# Altium PCB ENCODER_OD.PcbDoc
Units mil, origin at the board's own origin, x right, y up, seen from the top; angles counter-clockwise.
Board outline 6000 x 4000 mil, 2 copper layers (Top Layer, Bottom Layer); 4 components, 8 nets, 38 pads, 18 vias.
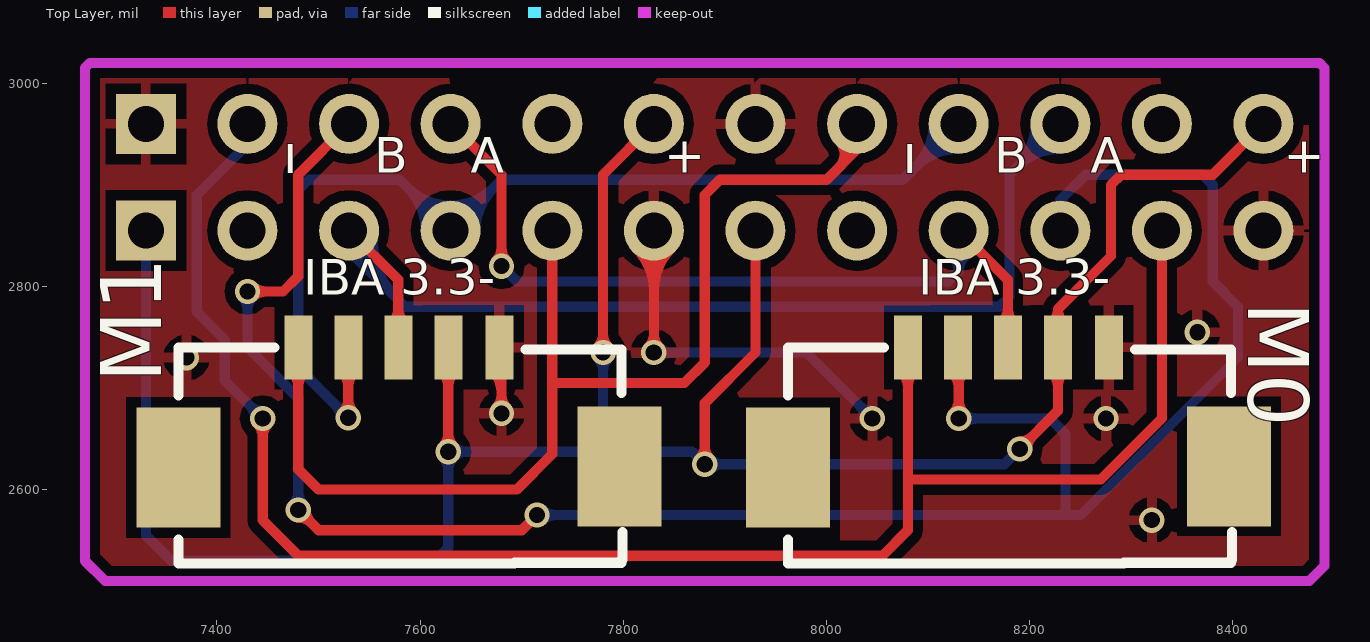
[diagram p0: Top Layer view]
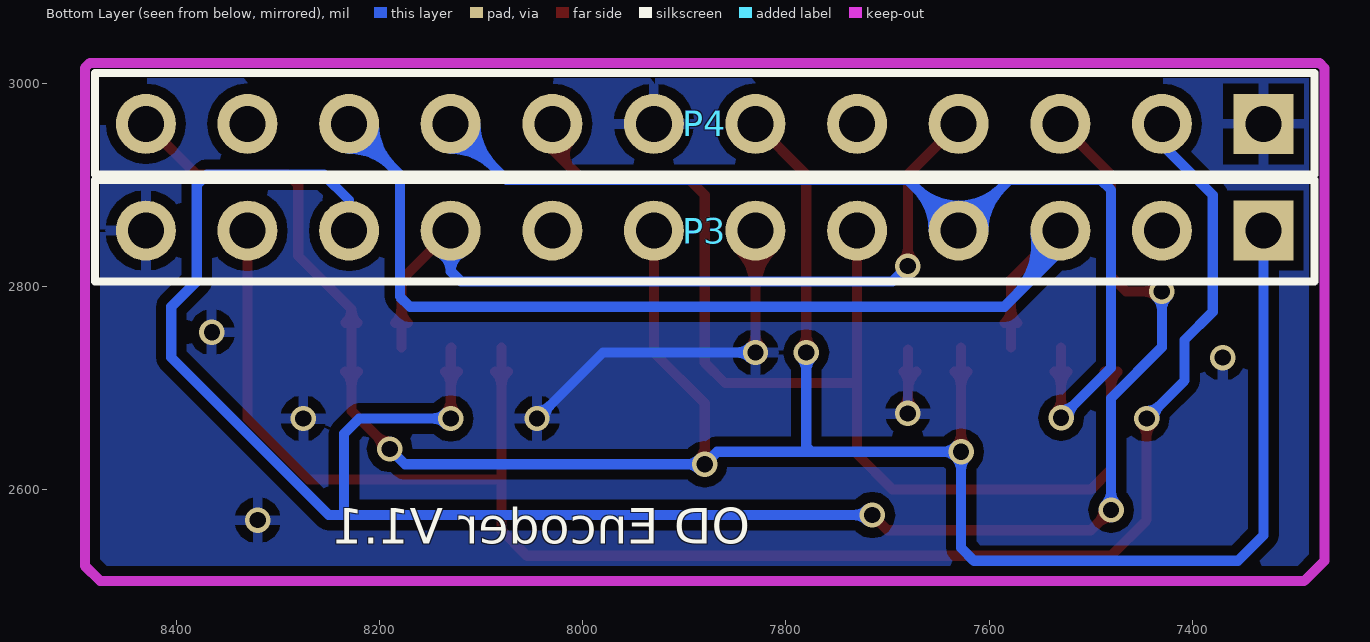
[diagram p1: Bottom Layer view, seen from below]

## Layer stack, top to bottom
Top Layer: signal copper 1.4
Dielectric: dielectric 12.6, FR-4, Dk 4.8
Bottom Layer: signal copper 1.4

## Board outline
1000,1000 7000,1000 7000,5000 1000,5000

## Design rules (kind name [scope] priority, off if disabled: settings)
Clearance [All] p1: gap=10
PolygonConnect [All] p1: connectstyle=Relief reliefconductorwidth=10 reliefentries=4 polygonreliefangle="90 Angle"
RoutingVias [All] p1: holewidth=28 width=50 viastyle="Through Hole" minholewidth=16 minwidth=25 maxholewidth=28 maxwidth=50
SilkscreenOverComponentPads [All] p1: minsilkscreentomaskgap=10
SolderMaskExpansion [All] p1: expansion=4
Width [All] p1: maxlimit=10 minlimit=10 preferedwidth=10
27 further rules are at their usual default settings.

## Components (designator, comment, footprint, x,y, rotation, side; value= is the part's Value field where it differs from the comment)
M0 "Header 5" PH1.25_5 8080,2740 r0 top (schematic designator M1)
M1 "Header 5" PH1.25_5 7480,2740 r0 top (schematic designator M0)
P3 "Header 12" HDR1X12 7330,2855 r0 bottom
P4 "Header 12" HDR1X12 7330,2960 r0 bottom

## Footprints (in the part's own frame and the unit in brackets; to place one, negate y for a bottom-side part, rotate by r counter-clockwise, add the part's x,y. Pads: shape width x height; smd on the part's side, far side on the other; paste and mask are expansions set on the pad)
HDR1X12 [mm] "Connector; Header; 12 Position"
  rect 1.5x1.5 hole 0.9: 1(0,0)
  round 1.5 hole 0.9: 2(2.54,0) 3(5.08,0) 4(7.62,0) 5(10.16,0) 6(12.7,0) 7(15.24,0) 8(17.78,0) 9(20.32,0) 10(22.86,0) 11(25.4,0) 12(27.94,0)
  silkscreen extent -1.27,-1.27 29.21,1.27
PH1.25_5 [mm]
  rect 0.7x1.6 smd: 1(0,0) 2(1.25,0) 3(2.5,0) 4(3.75,0) 5(5.029,0)
  rect 2.1x3 smd: ""(-3,-3) ""(8.026,-2.972)
  silkscreen extent -3,-5.4 8.1,0

## Part data
M0 M1: "Header, 5-Pin"
P3 P4: "Header, 12-Pin"

## Via types
v1: diameter 25, hole 16, Top Layer to Bottom Layer, 18 vias

## Nets (pads, with @x,y where several pads share a name; then routed paths per layer and width w, separated by ;. In a path a pad name is that pad's centre, name@x,y a point inside that pad or via, vN(x,y) a via of type N, cw(c..) or ccw(c..) an arc to the next point about the centre after c; other vN are vias at no path point)
3.3V: M0.4 M1.4 P3.1 P3.7 P4.6 P4.12 | length 2776.9
  Top Layer w10: M1.4@7621.43,2716.08 cw(c7606.44,2701.09) 7627.64,2701.09 cw(c7648.83,2701.09) M1.4@7633.85,2716.08 ; v1@7622.33,2642.67 ccw(c7609.53,2655.47) 7627.64,2655.47 ccw(c7645.74,2655.47) v1@7632.94,2642.67 ; v1(7627.64,2637.36) M1.4 ; v1@7774.7,2740.3 ccw(c7761.89,2753.11) 7780,2753.11 ccw(c7798.11,2753.11) v1@7785.3,2740.3 ; v1(7780,2735) 7780,2910 P4.6 ; v1@7874.7,2630.3 ccw(c7861.89,2643.11) 7880,2643.11 ccw(c7898.11,2643.11) v1@7885.3,2630.3 ; v1(7880,2625) 7880,2685 7930,2735 P3.7 ; v1(8190,2640) 8227.64,2677.64 M0.4 8227.64,2777.64 ; v1@8190,2647.5 ccw(c8190,2665.61) 8202.8,2652.8 ccw(c8215.61,2640) v1@8197.5,2640 ; M0.4@8221.43,2716.08 cw(c8206.44,2701.09) 8227.64,2701.09 cw(c8248.83,2701.09) M0.4@8233.85,2716.08 ; M0.4@8221.71,2764.2 ccw(c8209.43,2777.64) 8227.64,2777.64 ; M0.4@8233.56,2764.2 cw(c8245.85,2777.64) 8227.64,2777.64 ; P4.12 8380,2910 8290,2910 8280,2900 8280,2830 8227.64,2777.64
  Bottom Layer w10: P3.1 7330,2555 7355,2530 7615,2530 7627.64,2542.64 v1(7627.64,2637.36) 7775,2637.36 ; v1@7622.33,2632.06 cw(c7609.53,2619.26) 7627.64,2619.26 cw(c7645.74,2619.26) 7632.94,2632.06 cw(c7645.74,2619.26) 7645.74,2637.36 cw(c7645.74,2655.47) v1@7632.94,2642.67 ; v1@7774.7,2729.7 cw(c7761.89,2716.89) 7780,2716.89 cw(c7798.11,2716.89) v1@7785.3,2729.7 ; v1(7780,2735) 7780,2642.36 7775,2637.36 ; v1@7885.3,2619.7 cw(c7898.11,2606.89) 7898.11,2625 cw(c7898.11,2643.11) v1@7885.3,2630.3 ; v1(8190,2640) 8175,2625 v1(7880,2625) 7867.64,2637.36 7775,2637.36
A1: M1.3 P3.3 P4.10 | length 1364.1
  Top Layer w10: P3.3 7578.43,2806.57 M1.3 ; M1.3@7572.22,2763.92 ccw(c7557.23,2778.91) 7578.43,2778.91 ccw(c7599.62,2778.91) M1.3@7584.63,2763.92
  Bottom Layer w10: P3.3 7530,2835 7585,2780 8170,2780 8180,2790 8180,2910 P4.10 ; P3.3@7534.48,2854.38 ccw(c7576.66,2848.55) 7546.55,2818.45 ; P3.3@7544.39,2853.01 ccw(c7601.65,2845.1) 7560.78,2804.22 ; P3.3@7554.3,2851.64 ccw(c7626.64,2841.64) 7575,2790 ; P4.10@8205.47,2960 cw(c8146.26,2960) 8188.13,2918.13 cw(c8230,2876.26) P4.10@8230,2935.47 ; P4.10@8215.47,2960 cw(c8180.4,2960) 8205.2,2935.2 cw(c8230,2910.4) P4.10@8230,2945.47
A2: M0.3 P3.9 P4.4 | length 902.6
  Top Layer w10: P4.4 7680,2910 v1(7680,2820) ; v1@7674.7,2825.3 ccw(c7661.89,2838.11) 7680,2838.11 ccw(c7698.11,2838.11) v1@7685.3,2825.3 ; P3.9 8178.43,2806.57 M0.3 ; M0.3@8172.22,2763.92 ccw(c8157.23,2778.91) 8178.43,2778.91 ccw(c8199.62,2778.91) M0.3@8184.63,2763.92
  Bottom Layer w10: v1(7680,2820) 7695,2805 8120,2805 8130,2815 ; P3.9@8118.88,2833.14 cw(c8109.65,2815) 8130,2815 ; P3.9 8130,2815 ; P3.9@8141.12,2833.14 ccw(c8150.35,2815) 8130,2815
B1: M1.2 P3.4 P4.9 | length 1566.6
  Top Layer w10: M1.2@7523,2716.08 cw(c7508.02,2701.09) 7529.21,2701.09 cw(c7550.41,2701.09) M1.2@7535.42,2716.08 ; v1@7523.91,2676.09 ccw(c7511.11,2688.89) 7529.21,2688.89 ccw(c7547.32,2688.89) v1@7534.52,2676.09 ; v1(7529.21,2670.79) M1.2
  Bottom Layer w10: v1@7521.71,2670.79 ccw(c7503.61,2670.79) 7516.41,2683.59 ccw(c7529.21,2696.39) v1@7529.21,2678.29 ; v1(7529.21,2670.79) 7480,2720 7480,2895 7490,2905 7580,2905 P3.4 7680,2905 8075,2905 P4.9 ; P3.4@7605.47,2855 ccw(c7546.26,2855) 7588.13,2896.87 ccw(c7630,2938.74) 7630,2879.53 ccw(c7630,2938.74) 7671.87,2896.87 ccw(c7713.74,2855) P3.4@7654.53,2855 ; P3.4@7615.47,2855 ccw(c7580.4,2855) 7605.2,2879.8 ccw(c7630,2904.6) 7630,2869.53 ccw(c7630,2904.6) 7654.8,2879.8 ccw(c7679.6,2855) P3.4@7644.53,2855 ; P4.9@8105.47,2960 cw(c8046.26,2960) 8088.13,2918.13 cw(c8130,2876.26) P4.9@8130,2935.47 ; P4.9@8115.47,2960 cw(c8080.4,2960) 8105.2,2935.2 cw(c8130,2910.4) P4.9@8130,2945.47
B2: M0.2 P3.10 P4.3 | length 2335.1
  Top Layer w10: v1(7430,2795) 7465,2795 7480,2810 7480,2910 P4.3 ; v1@7435.3,2789.7 cw(c7448.11,2776.89) 7448.11,2795 cw(c7448.11,2813.11) v1@7435.3,2800.3 ; v1@7480,2572.5 cw(c7480,2554.39) 7492.8,2567.2 cw(c7505.61,2580) v1@7487.5,2580 ; v1(7480,2580) 7500,2560 7700,2560 v1(7715,2575) ; M0.2@8123,2716.08 cw(c8106.12,2699.19) 8130,2699.19 ; v1@8124.7,2675.3 ccw(c8111.89,2688.11) 8130,2688.11 ccw(c8148.11,2688.11) v1@8135.3,2675.3 ; M0.2 8130,2739.21 v1(8130,2670) ; 8130,2702.99 cw(c8148.51,2702.99) M0.2@8135.42,2716.08
  Bottom Layer w10: v1@7424.7,2789.7 cw(c7411.89,2776.89) 7430,2776.89 cw(c7448.11,2776.89) v1@7435.3,2789.7 ; v1(7430,2795) 7430,2740 7480,2690 v1(7480,2580) ; v1@7474.7,2585.3 ccw(c7461.89,2598.11) 7480,2598.11 ccw(c7498.11,2598.11) v1@7485.3,2585.3 ; v1(7715,2575) 8235,2575 ; v1@7720.3,2569.7 cw(c7733.11,2556.89) 7733.11,2575 cw(c7733.11,2593.11) v1@7720.3,2580.3 ; v1(8130,2670) 8220,2670 8235,2655 8235,2575 ; v1@8135.3,2664.7 cw(c8148.11,2651.89) 8148.11,2670 cw(c8148.11,2688.11) v1@8135.3,2675.3 ; P3.10 8230,2885 8255,2910 8370,2910 8380,2900 8380,2805 8405,2780 8405,2730 8250,2575 8235,2575
GND: M0.5 M1.5 P3.6 P3.12 P4.1 P4.7 | length 720.1
  Top Layer w10: M1.5@7671.79,2716.08 cw(c7651.98,2696.26) 7680,2696.26 ; v1@7674.7,2680.3 ccw(c7661.89,2693.11) 7680,2693.11 ccw(c7698.11,2693.11) v1@7685.3,2680.3 ; v1(7680,2675) M1.5@7680,2738 ; 7680,2705.92 cw(c7694.37,2705.92) M1.5@7684.21,2716.08 ; P3.6@7812.66,2837.66 cw(c7770.79,2795.79) 7830,2795.79 cw(c7889.21,2795.79) P3.6@7847.34,2837.66 ; P3.6@7819.73,2844.73 cw(c7794.93,2819.93) 7830,2819.93 cw(c7865.07,2819.93) P3.6@7840.27,2844.73 ; v1@7824.7,2740.3 ccw(c7811.89,2753.11) 7830,2753.11 ccw(c7848.11,2753.11) v1@7835.3,2740.3 ; v1(7830,2735) P3.6
  Bottom Layer w10: v1(7830,2735) 7980,2735 v1(8045,2670) ; v1@7835.3,2729.7 cw(c7848.11,2716.89) 7848.11,2735 cw(c7848.11,2753.11) v1@7835.3,2740.3 ; v1@8037.5,2670 ccw(c8019.39,2670) 8032.2,2682.8 ccw(c8045,2695.61) v1@8045,2677.5
  other v1: 8320,2570 8275,2670 7370,2730 8365,2755
I1: M1.1 P3.5 P4.8 | length 1219
  Top Layer w10: M1.1@7473.79,2716.08 cw(c7458.8,2701.09) 7480,2701.09 cw(c7501.2,2701.09) M1.1@7486.21,2716.08 ; M1.1 7480,2620 7500,2600 7695,2600 7730,2635 7730,2705 ; P3.5 7730,2705 ; 8012.5,2917.5 ccw(c7999.84,2930.16) P4.8@8012.57,2942.75 ; 8019.61,2924.61 ccw(c8006.99,2937.23) P4.8@8019.67,2949.78 ; P4.8 8030,2935 8000,2905 7895,2905 7880,2890 7880,2725 7860,2705 7730,2705
I2: M0.1 P3.11 P4.2 | length 1827.5
  Top Layer w10: v1@7439.7,2664.7 cw(c7426.89,2651.89) 7445,2651.89 cw(c7463.11,2651.89) v1@7450.3,2664.7 ; v1(7445,2670) 7445,2570 7480,2535 8055,2535 8080,2560 8080,2610 ; M0.1@8073.79,2716.08 cw(c8058.8,2701.09) 8080,2701.09 cw(c8101.2,2701.09) M0.1@8086.21,2716.08 ; M0.1 8080,2610 ; P3.11 8330,2670 8270,2610 8080,2610
  Bottom Layer w10: P4.2 7430,2940 7380,2890 7380,2775 7407.7,2747.3 7407.7,2707.3 v1(7445,2670) ; v1@7437.5,2670 ccw(c7419.39,2670) 7432.2,2682.8 ccw(c7445,2695.61) v1@7445,2677.5
pads on no net: M0. M1. P3.2 P3.8 P4.5 P4.11

## Polygon pours and split planes (outlines as drawn)
GND on Top Layer "Top Layer-No Net" (solid, remove dead copper, pour order 1000): 7243.47,3030 7253.47,3020 7253.47,2455 8528.47,2455 8538.47,2465 8548.47,2475 8548.47,3040
GND on Bottom Layer "Top Layer-No Net" (solid, remove dead copper, pour order 1001): 7220.57,3045.95 7220.57,2470.95 7225.57,2465.95 7230.57,2460.95 8520.57,2460.95 8520.57,3010.95 8505.57,3025.95

## Keep-outs
Keep-Out Layer:
  lines w10: 7270,2530 7290,2510 8475,2510 8490,2525 8490,3015 8485,3020 7275,3020 7270,3015 7270,2530

## Silkscreen, mask and mechanical layers (free items; w line width, h text height)
Top Overlay:
  text "I" at 7465,2900 h60
  text "B" at 7555,2900 h60
  text "A" at 7650,2900 h60
  text "+" at 7840,2900 h60
  text "I" at 8075,2900 h60
  text "B" at 8165,2900 h60
  text "A" at 8260,2900 h60
  text "+" at 8450,2900 h60
  text "IBA 3.3-" at 7485,2780 h60
  text "IBA 3.3-" at 8090,2780 h60
Bottom Overlay:
  text "OD Encoder V1.1" at 7835,2535 h60